# Altium PCB eBoard_ATMEGA328_V1-0.PcbDoc
Units mm, origin at the board's own origin, x right, y up, seen from the top; angles counter-clockwise.
Board outline 53.59 x 68.71 mm, 2 copper layers (Top Layer, Bottom Layer), stack 1.571 mm thick; 57 components, 52 nets, 216 pads, 187 vias.
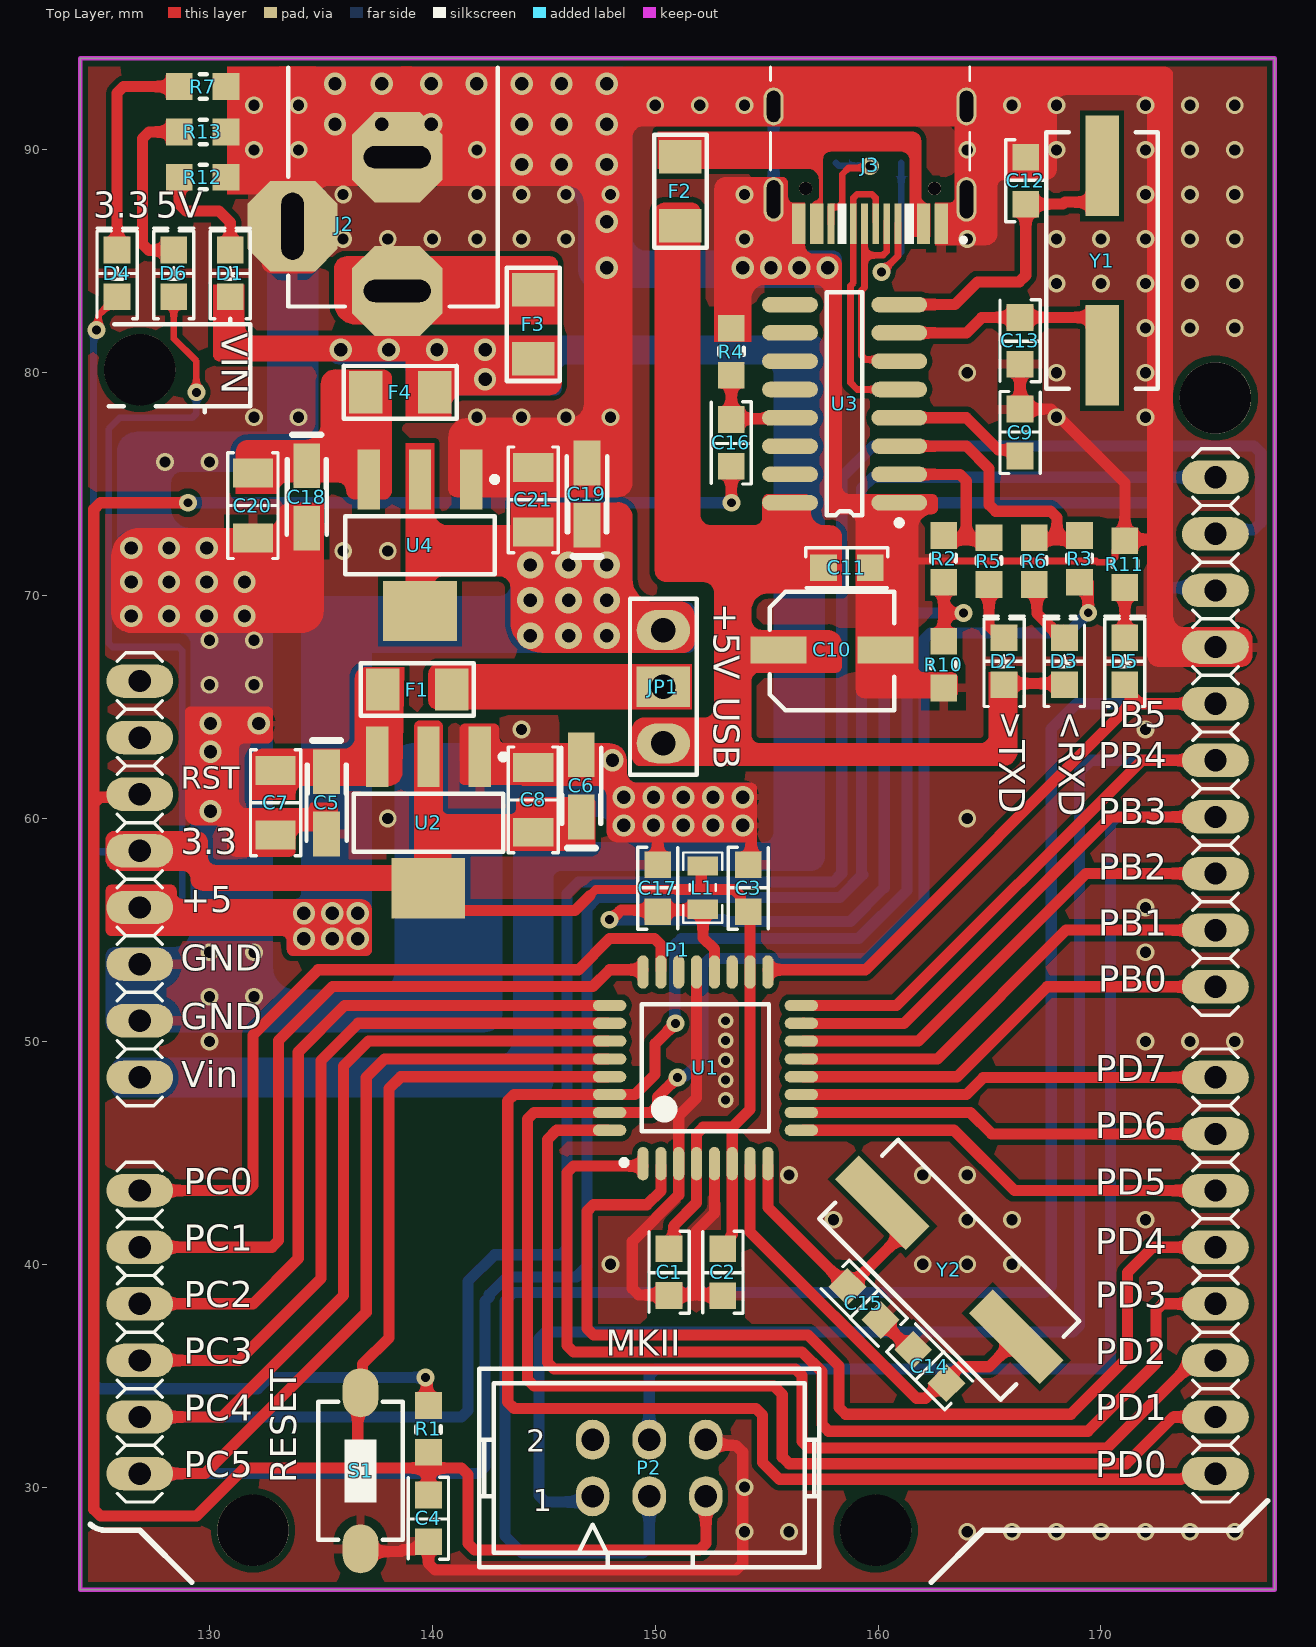
[diagram p0: Top Layer view]
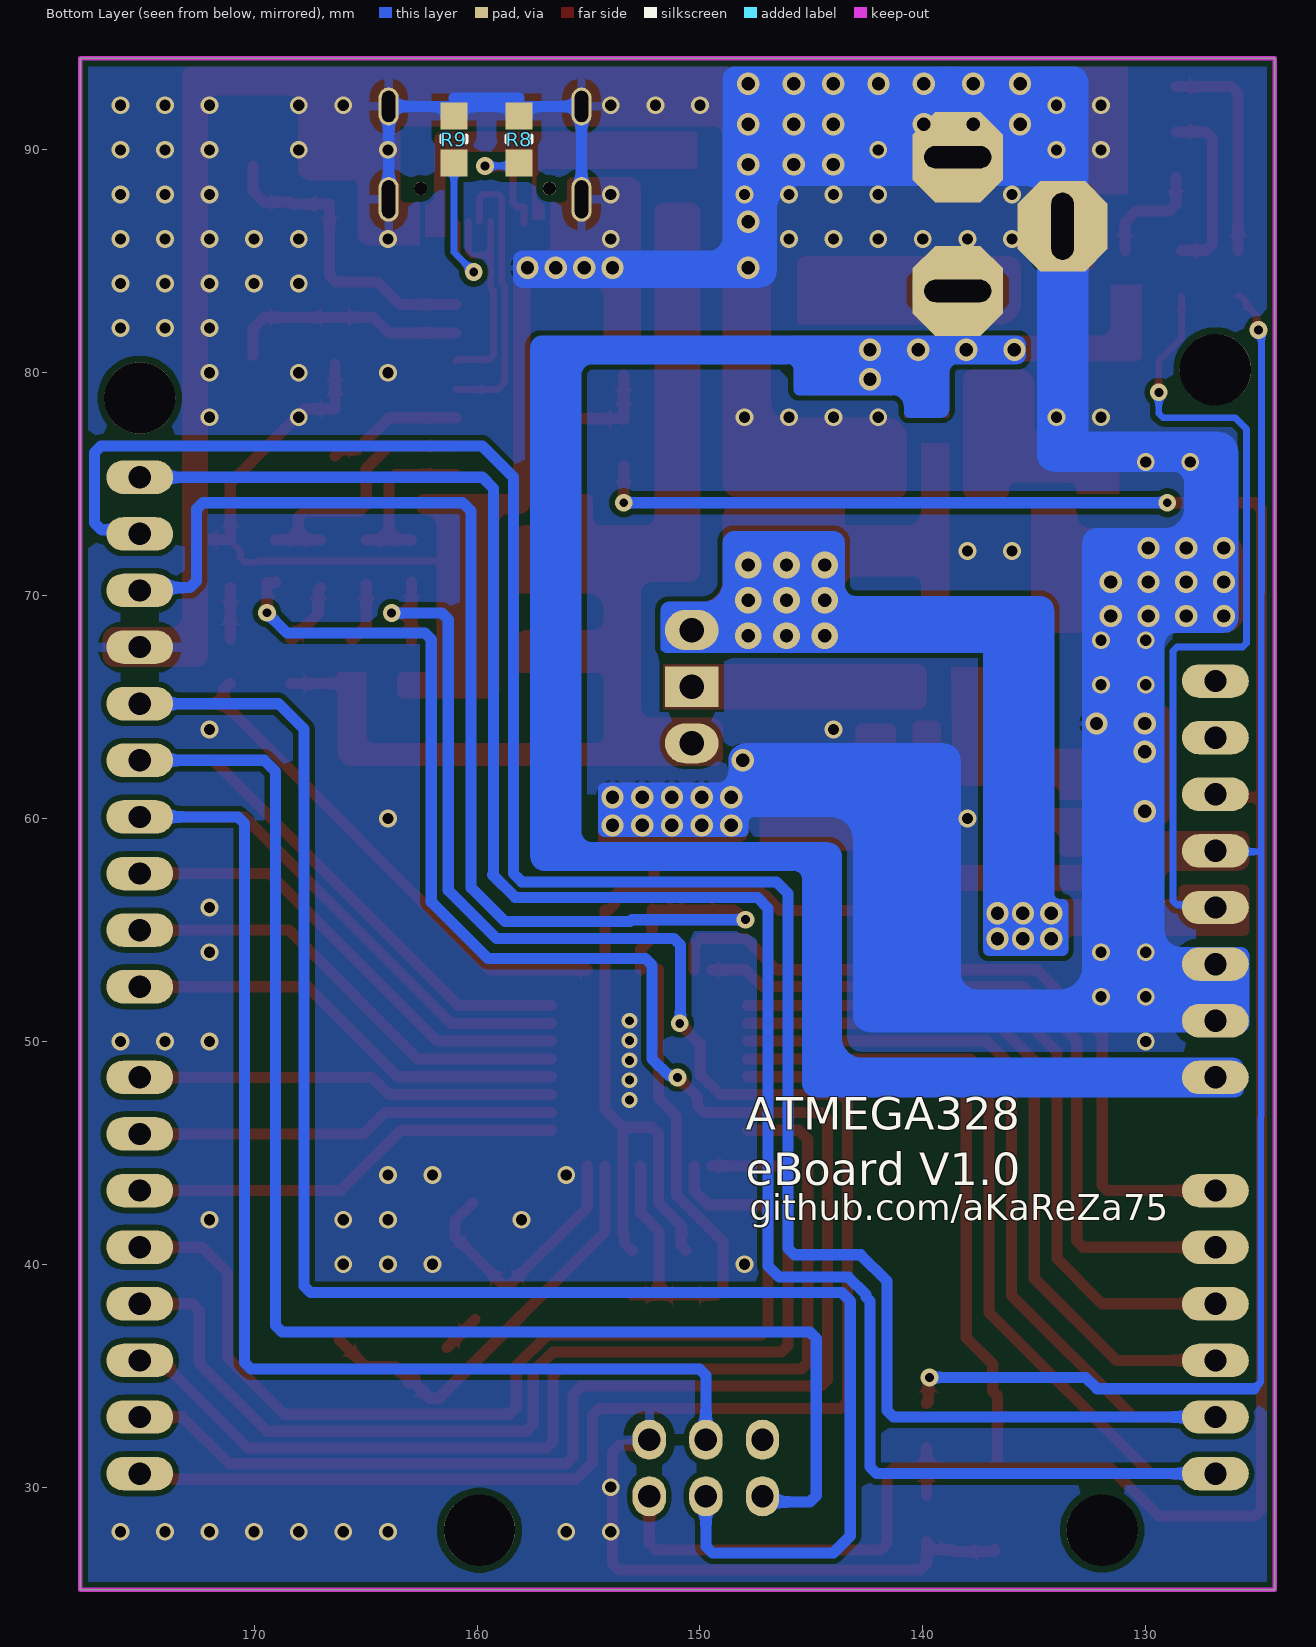
[diagram p1: Bottom Layer view, seen from below]

## Layer stack, top to bottom
Top Solder: solder mask 0.0102, Solder Resist, Dk 3.5
Top Layer: signal copper 0.0356
Dielectric 1: dielectric 1.5, FR-4, Dk 4.8
Bottom Layer: signal copper 0.0356
Bottom Solder: solder mask 0.0102, Solder Resist, Dk 3.5

## Board outline
124.206,25.4 124.206,94.107 177.8,94.107 177.8,25.4

## Design rules (kind name [scope] priority, off if disabled: settings)
AcuteAngle [All] p1: minimum=6.00000000000000E+0001 checktracksonly=TRUE
AssemblyTestPointUsage [All] p1 off:
AssemblyTestpoint [All] p1 off: testpointundercomponent=TRUE minsize=1.016 maxsize=2.54 preferedsize=1.524 minholesize=0 maxholesize=1.016 preferedholesize=0.813 testpointgrid=0.025 usegrid=TRUE gridtolerance=0 allowsidetop=TRUE allowsidebottom=TRUE
BoardOutlineClearance [All] p1: gap=0.2 ignorepadtopadclearanceinfootprint=FALSE
Clearance Poly_Clearance [All vs InPolygon] p1: gap=0.25 ignorepadtopadclearanceinfootprint=TRUE except(0.3: Arc-Hole Track-Hole SMDPad-Hole THPad-Hole Via-Hole Fill-Hole Poly-Hole Region-Hole Text-Hole)
Clearance [All] p2: gap=0.2 ignorepadtopadclearanceinfootprint=FALSE except(0.3: Arc-Hole Track-Hole SMDPad-Hole THPad-Hole Via-Hole Fill-Hole Poly-Hole Region-Hole Text-Hole)
FabricationTestPointUsage [All] p1 off: valid=0 allowmultiple=FALSE
FabricationTestpoint [All] p1 off: side=3 testpointundercomponent=TRUE minsize=1.016 maxsize=2.54 preferedsize=1.524 minholesize=0 maxholesize=1.016 preferedholesize=0.813 testpointgrid=0.025 allowsidetop=TRUE allowsidebottom=TRUE usegrid=TRUE gridtolerance=0
HoleSize [All] p1: absolutevalues=TRUE maxlimit=10 minlimit=0.4 maxpercent=80.000 minpercent=20.000
HoleToHoleClearance [All] p1: gap=0.3 allowstackedmicrovias=TRUE
MinimumAnnularRing [All] p1: minimumring=0.15
MinimumSolderMaskSliver [All] p1: minsoldermaskwidth=0.01
PolygonConnect [All] p1: thpad.connectstyle=Relief thpad.reliefconductorwidth=0.4 thpad.reliefentries=4 thpad.polygonreliefangle="90 Angle" thpad.airgapwidth=0.4 smdpad.connectstyle=Relief smdpad.reliefconductorwidth=0.4 smdpad.reliefentries=4 smdpad.polygonreliefangle="90 Angle" smdpad.airgapwidth=0.4 via.connectstyle=Direct via.reliefconductorwidth=0.254 via.reliefentries=4 via.polygonreliefangle="90 Angle" via.airgapwidth=0.254
RoutingVias [All] p1: holewidth=0.4 width=0.7 viastyle="Through Hole" minholewidth=0.4 minwidth=0.7 maxholewidth=3 maxwidth=6
SilkToSilkClearance [All] p1: silktosilkclearance=0
SilkToSolderMaskClearance [IsPad] p1: minsilkscreentomaskgap=0.01 clearancetoexposedcopper=TRUE
SolderMaskExpansion [All] p1: expansion=0.102 istentingtop=FALSE
Width [All] p1: maxlimit=10 minlimit=0.2 preferedwidth=0.3
21 further rules are at their usual default settings.

## Classes and differential pairs
component class U_USBtoTTL: C9 C10 C11 C12 C13 C16 D2 D3 F2 J3 R2 R3 R4 R5 R6 R8 R9 R10 U3 Y1
component class U_MicroController: C1 C2 C3 C4 C14 C15 C17 D5 L1 P1 P2 R1 R11 S1 U1 Y2
component class U_Supply: C5 C6 C7 C8 C18 C19 C20 C21 D1 D4 D6 F1 F3 F4 J2 JP1 R7 R12 R13 U2 U4

## Components (designator, comment, footprint, x,y, rotation, side; value= is the part's Value field where it differs from the comment)
C1 "100n" "CAP 0805/2012" 150.622,39.624 r270 top
C2 "100n" "CAP 0805/2012" 153.035,39.616 r270 top
C3 "100n" "CAP 0805/2012" 154.178,56.896 r90 top
C4 "100n" "CAP 0805/2012" 139.827,28.575 r270 top
C5 "10u" SMT_C_Tantalum_A 135.255,60.706 r270 top
C6 "22u" SMT_C_Tantalum_A 146.685,61.468 r90 top
C7 "100n" "CAP 1206/3216" 132.969,60.706 r270 top
C8 "100n" "CAP 1206/3216" 144.526,60.833 r90 top
C9 "10p" "CAP 0805/2012" 166.37,77.343 r90 top
C10 "10u" "CAP ALUM 5MM" 157.734,67.564 r0 top
C11 "100n" "CAP 0805/2012" 158.623,71.247 r0 top
C12 "22p" "CAP 0805/2012" 166.624,88.637 r90 top
C13 "22p" "CAP 0805/2012" 166.37,81.407 r270 top
C14 "22p" "CAP 0805/2012" 162.306,35.433 r135 top
C15 "22p" "CAP 0805/2012" 159.385,38.227 r315 top
C16 "100n" "CAP 0805/2012" 153.416,76.827 r270 top
C17 "100n" "CAP 0805/2012" 150.114,56.896 r90 top
C18 "10u" SMT_C_Tantalum_A 134.366,74.422 r270 top
C19 "22u" SMT_C_Tantalum_A 146.939,74.549 r90 top
C20 "100n" "CAP 1206/3216" 131.953,74.041 r270 top
C21 "100n" "CAP 1206/3216" 144.526,74.295 r90 top
D1 "Yellow" "LED 0805/2012 YELLOW" 130.937,84.455 r90 top
D2 "RED" "LED 0805/2012 RED" 165.65,67.056 r90 top value=Red
D3 "RED" "LED 0805/2012 RED" 168.36,67.056 r90 top value=Red
D4 "Green" "LED 0805/2012 GREEN" 125.857,84.455 r90 top
D5 "Green" "LED 0805/2012 GREEN" 171.069,67.056 r90 top
D6 "Red" "LED 0805/2012 RED" 128.397,84.455 r90 top
F1 "0.5A" 1206_F 139.319,65.786 r180 top
F2 "500m" 1206_F 151.13,88.138 r270 top
F3 "3A" 1206_F 144.526,82.169 r270 top
F4 "0.5A" 1206_F 138.557,79.121 r180 top
J2 "Female" "Power Jack BIG" 138.43,98.171 r270 top
J3 "12b" "HRO_TYPE-C-31-M-12 - Extended" 159.639,91.948 r180 top
JP1 "0b" "jumper selector" 150.368,68.453 r270 top
L1 "100u" IND0805 152.135,56.898 r270 top
P1 "UNO" ARDUINO_UNO_CONNECTOR 126.873,80.137 r270 top locked
P2 "3x2" IDC_2X3 149.733,30.861 r0 top
R1 "10K" "RES 0805 (2012X06L)" 139.827,31.766 r90 top
R2 "1K" "RES 0805 (2012X06L)" 162.941,72.501 r270 top
R3 "1K" "RES 0805 (2012X06L)" 169.037,72.501 r270 top
R4 "10K" "RES 0805 (2012X06L)" 153.416,81.791 r270 top
R5 "680" "RES 0805 (2012X06L)" 164.973,72.399 r270 top
R6 "680" "RES 0805 (2012X06L)" 167.005,72.399 r270 top
R7 "220b" "RES 0805 (2012X06L)" 130.548,92.837 r180 top
R8 "4.7K" "RES 0805 (2012X06L)" 158.115,91.313 r270 bottom
R9 "4.7K" "RES 0805 (2012X06L)" 161.036,91.313 r270 bottom
R10 "1.8K" "RES 0805 (2012X06L)" 162.941,66.056 r90 top
R11 "1k" "RES 0805 (2012X06L)" 171.069,72.263 r270 top value=1K
R12 "1.8k" "RES 0805 (2012X06L)" 130.548,88.773 r180 top value=1.8K
R13 "680b" "RES 0805 (2012X06L)" 130.548,90.805 r180 top
S1 "PB" SW_PB_SMD_2PIN_SPST_6X3X2 136.779,30.734 r90 top
U1 "ATmega328P" ATMEGA328 152.254,48.813 r90 top
U2 "3.3V" SOT223_M 139.827,59.817 r270 top
U3 "CH340G" SO16_M 158.496,78.613 r180 top
U4 "3.3V" SOT223_M 139.446,72.263 r270 top
Y1 "12M" "Crystal SMD" 170.053,85.031 r270 top
Y2 "12M" "Crystal SMD" 163.195,39.751 r135 top

## Footprints (in the part's own frame and the unit in brackets; to place one, negate y for a bottom-side part, rotate by r counter-clockwise, add the part's x,y. Pads: shape width x height; smd on the part's side, far side on the other; paste and mask are expansions set on the pad)
1206_F [mm] "Surface mount FUSE 1206"
  rect 1.5x1.9 smd: 1(-1.55,0) 2(1.55,0)
  silkscreen extent -2.54,-1.18 2.54,1.18, body extent -2.64,-1.28 2.64,1.29, height 0.71
ARDUINO_UNO_CONNECTOR [mm] "Arduino Uno Connector"
  oval 1.5x3 hole 1: AD1(36.83,0) AD2(39.37,0) AD3(41.91,0) AD4(44.45,0) AD5(46.99,0) AD6(49.53,0) IOH1(27.686,48.26) IOH2(25.146,48.26) IOH3(22.606,48.26) IOH4(20.066,48.26) IOH5(17.526,48.26) IOH6(14.986,48.26) IOH7(12.446,48.26) IOH8(9.906,48.26) IOH9(7.366,48.26) IOH10(4.826,48.26) IOL1(49.53,48.26) IOL2(46.99,48.26) IOL3(44.45,48.26) IOL4(41.91,48.26) IOL5(39.37,48.26) IOL6(36.83,48.26) IOL7(34.29,48.26) IOL8(31.75,48.26) POW1(13.97,0) POW2(16.51,0) POW3(19.05,0) POW4(21.59,0) POW5(24.13,0) POW6(26.67,0) POW7(29.21,0) POW8(31.75,0)
  round 3.2 hole 3.2: H1(0,0) H2(52.07,5.08) H3(52.07,33.02) H4(1.27,48.26)
  silkscreen extent 3.56,-2.21 54.41,50.6, body extent -1.7,-2.34 54.54,50.73, height 1.27
ATMEGA328 [mm] "Thin QFP, 32-Leads, Body 7x7mm, Pitch 0.8mm, IPC Low Density"
  oval 1.5x0.5 smd: 1(-4.301,2.8) 2(-4.301,2) 3(-4.301,1.2) 4(-4.301,0.4) 5(-4.301,-0.4) 6(-4.301,-1.2) 7(-4.301,-2) 8(-4.301,-2.8) 17(4.301,-2.8) 18(4.301,-2) 19(4.301,-1.2) 20(4.301,-0.4) 21(4.301,0.4) 22(4.301,1.2) 23(4.301,2) 24(4.301,2.8)
  oval 0.5x1.5 smd: 9(-2.8,-4.301) 10(-2,-4.301) 11(-1.2,-4.301) 12(-0.4,-4.301) 13(0.4,-4.301) 14(1.2,-4.301) 15(2,-4.301) 16(2.8,-4.301) 25(2.8,4.301) 26(2,4.301) 27(1.2,4.301) 28(0.4,4.301) 29(-0.4,4.301) 30(-1.2,4.301) 31(-2,4.301) 32(-2.8,4.301)
  silkscreen extent -4.37,-2.85 2.85,3.77, body extent -5.75,-5.75 5.75,5.75, height 1.2
"CAP 0805/2012" [mm] "Chip Capacitor, 2-Leads, Body 2.00x1.20mm, IPC Medium Density"
  rect 1.2x1.2 smd: 1(-1.075,0) 2(1.025,0)
  silkscreen extent -1.86,-0.9 1.82,0.9, body extent -1.94,-0.97 1.89,0.98, height 1.15
"CAP 1206/3216" [mm] "Chip Capacitor, 2-Leads, Body 3.25x1.60mm, IPC Medium Density"
  rect 1.3x1.8 smd: 1(-1.45,0) 2(1.45,0)
  silkscreen extent -2.37,-1.12 2.37,1.12, body extent -2.45,-1.2 2.45,1.2, height 1.6
"CAP ALUM 5MM" [mm] "Aluminum Electrolytic Capacitor, Body 6.60x6.60x7.70mm, IPC Low Density"
  rect 2.5x1.2 smd: 1(-2.2,0) 2(2.6,0)
  silkscreen extent -2.6,-2.7 3,2.6, body extent -5.32,-3.92 5.33,3.93, height 7.7
"Crystal SMD" [mm] "DESIGNER ABBAS BASEREH"
  rect 4.5x1.5 smd: 1(-4.25,0) 2(4.25,0)
  silkscreen extent -5.75,-2.5 5.75,2.5, body extent -6.9,-2.8 6.9,2.8, height 4
"HRO_TYPE-C-31-M-12 - Extended" [mm]
  rect 0.6x1.8 smd mask+0.05: A1_B12(-3.2,5.264) A4_B9(-2.4,5.264) B1_A12(3.2,5.264) B4_A9(2.4,5.264)
  rect 0.3x1.8 smd mask+0.05: A5(-1.25,5.264) A6(-0.25,5.264) A7(0.25,5.264) B5(1.75,5.264) B6(0.75,5.264) B7(-0.75,5.264)
  oval 0.9x2 hole 0.6 slot 1.7 at 90 deg: S1(-4.325,4.17) S2(4.325,4.17)
  oval 0.9x1.7 hole 0.6 slot 1.4 at 90 deg: S3(-4.325,0) S4(4.325,0)
  round 0.6 hole 0.6 unplated: ""(-2.89,3.68) ""(2.89,3.68)
  silkscreen extent -4.47,-1.77 4.47,6.17, body extent -5.56,-2.87 9.06,6.21, height 3.26
IDC_2X3 [mm] "IDC2X3 FOR PROGPIN AND JUMPER BOX AND ETC. DESIGNER ABBAS BASEREH"
  oval 1.5x1.8 hole 1 mask+0.1: 1(-2.54,-1.27) 2(-2.54,1.27) 3(0,-1.27) 4(0,1.27) 5(2.54,-1.27) 6(2.54,1.27)
  silkscreen extent -7.62,-4.44 7.62,4.44, body extent -7.88,-4.67 7.88,4.68, height 7.62
IND0805 [mm] "Chip Inductor, 2-Leads, Body 2/00x1/25mm, IPC Medium Density DESIGNER:ABBAS BASEREH"
  rect 0.87x1.37 smd: 1(-0.97,0) 2(0.97,0)
  silkscreen extent -1.58,-0.87 1.58,0.87, body extent -1.68,-0.97 1.68,0.98, height 0.5
"jumper selector" [mm]
  oval 1.8x2.4 hole 1.1: 1(0,0) 3(5.08,0)
  rect 1.8x2.4 hole 1.1: 2(2.54,0)
  silkscreen extent -1.4,-1.5 6.48,1.5, body extent -1.5,-1.6 6.58,1.6, height 1.27
"LED 0805/2012 GREEN" [mm] "Chip Diode, 2-Leads, Body 2.00x1.25mm, IPC Medium Density"
  rect 1.2x1.2 smd: 1(-1.05,0) 2(1.05,0)
  silkscreen extent -2.03,-0.9 2.03,0.9, body extent -2.11,-0.97 2.11,0.98, height 0.7
"LED 0805/2012 RED" [mm] "Chip Diode, 2-Leads, Body 2.00x1.25mm, IPC Medium Density"
  rect 1.2x1.2 smd: 1(-1.05,0) 2(1.05,0)
  silkscreen extent -2.03,-0.9 2.03,0.9, body extent -2.11,-0.97 2.11,0.98, height 0.7
"LED 0805/2012 YELLOW" [mm] "Chip Diode, 2-Leads, Body 2.00x1.25mm, IPC Medium Density"
  rect 1.2x1.2 smd: 1(-1.05,0) 2(1.05,0)
  silkscreen extent -2.03,-0.9 2.03,0.9, body extent -2.11,-0.97 2.11,0.98, height 0.7
"Power Jack BIG" [mm] "Power Adaptor Jack"
  oct 4.05x4.05 hole 1 slot 3 at 90 deg: 1(14.5,0) 2(8.5,0)
  oct 4.05x4.05 hole 1 slot 3 at 0 deg: 3(11.6,-4.7)
  Top Layer region: 13.125,-5.7 13.625,-5.2 13.625,-4.2 13.125,-3.7 10.075,-3.7 9.575,-4.2 9.575,-5.2 10.075,-5.7
  Top Layer region: 7.5,-1.525 8,-2.025 9,-2.025 9.5,-1.525 9.5,1.525 9,2.025 8,2.025 7.5,1.525
  Top Layer region: 13.5,-1.525 14,-2.025 15,-2.025 15.5,-1.525 15.5,1.525 15,2.025 14,2.025 13.5,1.525
  Bottom Layer region: 13.125,-5.7 13.625,-5.2 13.625,-4.2 13.125,-3.7 10.075,-3.7 9.575,-4.2 9.575,-5.2 10.075,-5.7
  Bottom Layer region: 7.5,-1.525 8,-2.025 9,-2.025 9.5,-1.525 9.5,1.525 9,2.025 8,2.025 7.5,1.525
  Bottom Layer region: 13.5,-1.525 14,-2.025 15,-2.025 15.5,-1.525 15.5,1.525 15,2.025 14,2.025 13.5,1.525
  silkscreen extent 4.49,-4.9 15.2,4.5, body extent 4.39,-5.8 15.6,4.6, height 1.27
"RES 0805 (2012X06L)" [mm] "Chip Resistor, 2-Leads, Body 2.0x1.3mm, IPC High Density _ (0.100 W)"
  rect 1.2x1.2 smd: 1(-0.2,0) 2(1.9,0)
  silkscreen extent 0.67,-0.55 0.98,0.55, body extent -0.9,-0.8 2.6,0.8, height 0.65
SMT_C_Tantalum_A [mm] "Capacitor, SM Tantalum; Body 3.2 x 1.6 mm (LxW typ)"
  rect 2x1.2 smd: 1(-1.4,0) 2(1.4,0)
  silkscreen extent -2.79,-0.9 1.7,0.9, body extent -2.95,-1.07 2.59,1.07, height 1.8
SO16_M [mm] "16-Pin Small Outline Integrated Circuit 1.27 mm Pitch, IPC Low Density - DESIGNER ABBAS BASEREH"
  oval 2.5x0.7 smd: 1(-2.45,4.445) 2(-2.45,3.175) 3(-2.45,1.905) 4(-2.45,0.635) 5(-2.45,-0.635) 6(-2.45,-1.905) 7(-2.45,-3.175) 8(-2.45,-4.445) 9(2.45,-4.445) 10(2.45,-3.175) 11(2.45,-1.905) 12(2.45,-0.635) 13(2.45,0.635) 14(2.45,1.905) 15(2.45,3.175) 16(2.45,4.445)
  silkscreen extent -2.58,-5 0.8,5.47, body extent -4.25,-5.55 4.25,5.6, height 1.75
SOT223_M [mm] "SOT223, 4-Leads, Body 6.5x3.5mm, Pitch 2.3mm, Lead Span 7mm, IPC Low Density"
  rect 2.7x1 smd: 1(-2.95,2.3) 2(-2.95,0) 3(-2.95,-2.3)
  rect 2.7x3.3 smd: 4(2.95,0)
  silkscreen extent -3.07,-3.35 1.3,3.48, body extent -4.85,-3.9 4.85,3.9, height 1.7
SW_PB_SMD_2PIN_SPST_6X3X2 [mm] "SWITCH, PUSHBUTTON, SMD, SPST, 6X3.5X2.5mm, RS-282G05A3, SKQYPA, 50000 Cycles"
  oval 2.2x1.6 smd mask+0.1: 1(-3.5,0) 2(3.5,0)
  silkscreen extent -3.1,-1.9 3.1,1.9, body extent -4.7,-2 4.7,2, height 5

## Part data
C1 C2 C3 C4 C11 C16 C17: library part Cap_Multi_SMD_100nF_0805, "Bipolar ceramic capacitor SMD", Package=0805, Rating=50V, Inflow=inflow?, Type=MultiLayer, Validation=Valid
C5 C18: library part Cap_Tantalum, "Tantalum Capacitor,TAJ Series-SMD", Package=Package?, Rating=16V, Inflow=inflow?, Type=Tantalum, Validation=Valid
C6 C19: library part Cap_Tantalum, "Tantalum Capacitor,TAJ Series-SMD", Package=Package?, Rating=6.3V, Inflow=inflow?, Type=Tantalum, Validation=Valid
C7 C8 C20 C21: library part Cap_Multi_SMD_100nF_1206, "Bipolar ceramic capacitor SMD", Package=1206, Rating=50V, Inflow=inflow?, Type=MultiLayer, Validation=Valid
C9 C12 C13 C14 C15: library part Cap_Multi_SMD_0805, "Bipolar ceramic capacitor SMD", Package=0805, Rating=Rating?, Inflow=inflow?, Type=MultiLayer, Validation=Valid
C10: library part Cap_Electrolit_SMD, "Electrolit Capacitor SMD", Package=SMD, Rating=6.3V, Inflow=inflow?, Type=Electrolit, Validation=Valid
D1 D2 D3 D4 D5 D6: library part Semi_LED_SMD, "LED", Package=Package?, Rating=Rating?, Inflow=inflow?, Type=LED, Validation=Valid
F1 F2 F3 F4: library part Other_Elec_Fuse_SMD, "Short circiut  protection", Package=1206, Rating=Rating?, Inflow=inflow?, Type=Fast, Validation=Valid
J2: library part Con_Power_Jack, "Power Jack", Package=Package?, Rating=Rating?, Inflow=6127, Type=Type?, Validation=Valid
J3: library part Con_USB_C, "USB C Female Connector", Package=SMD, Rating=Rating?, Inflow=inflow?, Type=C, Validation=Valid
JP1: library part SW_Other_JSelector_Dip, "Jumper Selector", Package=Dip, Rating=Rating?, Inflow=5145, Type=Selector, Validation=NT
L1: library part Ind_SMD_0805, "Inductor", Package=0805, Rating=Rating?, Inflow=inflow?, Type=SMD, Validation=Valid
P1: library part Con_Arduino_UNO_Con, "Arduino UNO Connector", Package=Package?, Rating=Rating?, Inflow=inflow?, Type=Type?, Validation=NT
P2: library part Con_Prog_MKII_ISP, "6 Pin Standard ISP Header For MKII", Package=Package?, Rating=Rating?, Inflow=inflow?, Type=Type?, Validation=NT
R1 R2 R3 R4 R5 R6 R7 R8 R9 R10 R11 R12 R13: library part Res_SMD_0805, "Resistor", Package=0805, Rating=0.125W, Inflow=inflow?, Type=10%, Validation=Valid
S1: library part SW_PushButton_2_SMD, "SMT Tactile ‎Switch", Package=SMD, Rating=2b, Inflow=8260, Type=Vertical, Validation=Valid
U1: library part IC_MCU_ATmega328P_SMD, "8-Bit AVR Microcontroller with 32K Bytes of In-System Programmable Flash Memory", Package=Package?, Rating=Rating?, Inflow=inflow?, Type=Type?, Validation=Valid
U2 U4: library part IC_Reg_AMS1117_3.3, "1'A Positive voltage regulator", Package=SOT223, Rating=1A, Inflow=5217, Type=LDO, Validation=Valid
U3: library part IC_Converter_CH340G, "TTL To USB Chip", Package=SO-16, Rating=Rating?, Inflow=inflow?, Type="USB to TTL", Validation=Valid
Y1 Y2: library part Other_Elec_Xtal_SMD, "Crystal Oscillator", Package=SMD, Rating=Rating?, Inflow=inflow?, Type=Quartz, Validation=Valid

## Via types
v1: diameter 0.8, hole 0.5, Top Layer to Bottom Layer, tented both sides, 102 vias
v2: diameter 1, hole 0.6, Top Layer to Bottom Layer, tented both sides, 59 vias
v3: diameter 0.8, hole 0.4, Top Layer to Bottom Layer, tented both sides, 12 vias
v4: diameter 1.2, hole 0.6, Top Layer to Bottom Layer, tented both sides, 9 vias
v5: diameter 0.7, hole 0.4, Top Layer to Bottom Layer, tented both sides, 5 vias

## Nets (pads, with @x,y where several pads share a name; then routed paths per layer and width w, separated by ;. In a path a pad name is that pad's centre, name@x,y a point inside that pad or via, vN(x,y) a via of type N, cw(c..) or ccw(c..) an arc to the next point about the centre after c; other vN are vias at no path point)
+3.3: C1.1 C2.1 C3.1 C6.1 C8.1 D4.1 L1.1 P1.POW4 R1.2 U1.4 U1.6 U1.18 U2.2 U2.4 | length 123.9
  Top Layer w0.3: v3(124.933,81.915) 125.029,82.011 125.029,82.577 125.507,83.055 125.507,83.205 125.757,83.455 D4.1@125.857,83.455
  Top Layer w0.4: 147.07,56.547 147.344,56.821 150.88,56.821 150.887,56.813 150.958,56.813
  Top Layer w0.5: P1.POW4 129.032,58.547 ; v3(139.7,34.925) 139.757,34.868 139.757,33.836 R1.2@139.827,33.766 ; U2.4@139.827,56.817 139.827,59.309 ; U2.4 141.227,55.88 146.403,55.88 147.07,56.547 ; U2.2@139.827,63.017 139.827,59.309 ; C8.1 144.476,59.433 139.951,59.433 139.827,59.309 ; C8.1@144.57,59.383 144.62,59.433 146.392,59.433 146.685,59.726 C6.1@146.685,60.468 ; C1.1@150.622,40.624 150.838,40.84 150.838,41.745 151.854,42.761 151.854,45.853 152.147,46.146 153.454,46.146 ; 150.958,56.813 153.535,56.813 153.828,56.521 153.828,56.171 154.103,55.896 154.254,55.896 U1.18 154.254,46.946 153.454,46.146 ; 151.937,56.819 152.062,56.945 152.062,57.796 L1.1 ; C2.1@153.039,40.616 153.385,40.962 153.385,41.265 153.454,41.334 U1.6 153.454,46.146
  Bottom Layer w0.3: 124.841,34.71 124.821,58.508 124.801,81.685 124.801,81.808 124.896,81.903 v3@124.911,81.916 ; 124.851,58.508 P1.POW4@126.834,58.508 ; 124.862,34.689 125.134,34.417
  Bottom Layer w0.5: 125.134,34.417 132.186,34.417 132.694,34.925 v3(139.7,34.925) ; P1.POW4@126.834,58.508 P1.POW4
+5: C19.1 C21.1 D6.1 JP1.1 P1.POW5 U4.2 U4.4 | length 60.3
  Top Layer w0.3: D6.1@128.397,83.455 128.397,81.534 129.413,80.518 v3(129.413,79.121)
  Top Layer w0.5: U4.4@139.446,69.263 139.446,72.644 ; U4.2@139.446,75.463 139.446,72.644 ; C19.1 146.939,72.683 146.646,72.39 144.777,72.39 C21.1@144.526,72.641 ; JP1.1 147.828,68.453 146.113,68.453 145.034,68.453 144.526,68.961 144.526,69.787 144.526,71.374 C21.1@144.526,72.641 ; 139.446,72.644 139.449,72.641 C21.1@144.526,72.641
  Bottom Layer w0.3: P1.POW5 126.991,56.125 128.602,56.125 128.778,56.301 128.778,67.515 128.602,67.691 125.652,67.691 125.476,67.867 125.476,77.47 125.972,77.966 129.238,77.991 129.413,78.166 v3(129.413,79.121)
  other v2: 134.239,54.61 135.509,54.61 136.652,54.61 134.239,55.753 135.509,55.753 136.652,55.753
  other v4: 144.399,68.199 146.113,68.199 147.828,68.199 144.399,69.787 146.113,69.787 147.828,69.787 144.399,71.374 146.113,71.374 147.828,71.374
ADC6: U1.19
ADC7: U1.22
ARef: C17.1 L1.2 P1.IOH8 U1.20 | length 55.7
  Top Layer w0.5: v3(147.955,55.46) 148.036,55.46 148.464,55.888 150.106,55.888 150.114,55.896 152.103,55.896 L1.2 152.146,55.918 152.146,54.646 152.654,54.138 U1.20@152.654,53.213
  Bottom Layer w0.5: v3(147.955,55.46) 153.051,55.46 153.139,55.372 158.75,55.372 160.274,56.896 160.274,73.787 160.655,74.168 172.3,74.168 172.593,73.875 172.593,70.651 172.886,70.358 175.006,70.358 P1.IOH8
GND: C1.2 C2.2 C3.2 C4.2 C5.2 C6.2 C7.2 C8.2 C9.2 C10.2 C11.2 C12.2 C13.2 C14.2 C15.2 C17.2 C18.2 C19.2 C20.2 C21.2 J2.2 J2.3 J3.A1_B12 J3.B1_A12 J3.S1 J3.S2 J3.S3 J3.S4 P1.IOH7 P1.POW6 P1.POW7 P2.6 R4.1 R7.1 R8.1 R9.1 R10.1 R11.1 R12.1 R13.1 S1.1 U1.3 U1.5 U1.21 U2.1 U3.1 U4.1 | length 156.1
  Top Layer w0.3: 161.496,71.551 169.782,71.551 169.832,71.501 170.443,71.501 170.619,71.677 170.619,72.013 R11.1 R11.1@171.069,72.501
  Top Layer w0.5: 131.548,88.773 131.548,90.805 ; 131.548,92.837 131.548,90.805 ; C7.2 132.969,59.271 133.877,60.179 133.877,60.214 133.908,60.183 134.905,60.183 134.905,60.138 135.255,59.788 C5.2 ; J2.3 133.73,86.698 133.73,90.679 133.604,90.805 ; S1.1 136.779,27.107 138.603,27.107 138.696,27.2 139.477,27.2 C4.2 139.827,26.582 140.12,26.289 153.631,26.289 153.924,26.582 153.924,28 153.924,30 153.924,31.584 153.631,31.877 152.273,31.877 P2.6 ; J2.2 137.155,89.671 136.531,90.295 136.404,90.295 136.347,90.352 136.347,90.378 136.054,90.671 136.054,90.678 135.128,90.678 135.001,90.805 133.604,90.805 ; U4.1@141.746,75.463 141.853,75.569 144.526,75.569 144.702,75.745 146.735,75.745 C19.2 ; U2.1@142.127,63.017 142.127,62.699 142.176,62.65 144.159,62.65 C8.2 144.618,62.375 146.592,62.375 C6.2@146.685,62.468 ; C17.2@150.114,57.896 150.114,59.016 150.407,59.309 154.012,59.309 154.305,59.016 154.305,58.023 C3.2@154.178,57.896 ; U1.21@151.854,53.213 151.854,47.46 151.054,46.66 151.054,44.413 151.054,43.104 148.971,41.021 148.971,38.917 149.264,38.624 150.622,38.624 150.626,38.62 151.828,38.62 ; U1.5@152.654,44.413 152.654,42.291 151.828,41.465 151.828,38.62 ; C2.2@153.035,38.616 153.031,38.62 151.828,38.62 ; C15.2@160.092,37.52 C14.2@161.345,36.267 ; C10.2 160.023,67.875 160.023,71.374 160.023,74.076 160.115,74.168 U3.1 ; J3.A1_B12@162.839,86.784 162.839,86.41 162.889,86.36 163.664,86.36 163.887,86.583 163.887,87.701 J3.S1 v1@163.964,89.662 ; J3.S3 v1@163.964,89.662 ; C13.2 C9.2 167.758,78.368 168.063,78.063 171.069,75.057 171.069,72.501 171.085,72.517 172.554,72.517 172.847,72.224 172.847,68.111 173.14,67.818 175.006,67.818 P1.IOH7 ; C12.2 v1@163.964,89.662 ; 131.548,90.805 133.604,90.805
  Bottom Layer w0.5: J3.S2 J3.S4 J3.S3 J3.S1 ; 158.115,92.313 161.036,92.313
  other v1: 154,28 156,28 164,28 166,28 168,28 170,28 172,28 174,28 176,28 154,30 148,40 162,40 164,40 166,40 158,42 164,42 166,42 172,42 156,44 162,44 164,44 130,50 172,50 174,50 176,50 130,52 132,52 130,54 132,54 172,54 172,56 138,60 164,60 144,64 172,64 130,66 132,66 130,68 132,68 136,72 138,72 128,76 130,76 132,78 134,78 142,78 144,78 146,78 148,78 168,78 172,78 164,80 168,80 172,80 172,82 174,82 176,82 168,84 170,84 172,84 174,84 176,84 136,86 138,86 140,86 142,86 144,86 146,86 154,86 164,86 168,86 170,86 172,86 174,86 176,86 136,88 142,88 144,88 146,88 148,88 154,88 172,88 174,88 176,88 132,90 134,90 142,90 164,90 168,90 172,90 174,90 176,90 132,92 134,92 150,92 152,92 154,92 166,92 168,92 172,92 174,92 176,92
  other v2: 148.59,59.69 149.923,59.69 151.257,59.69 152.59,59.69 153.924,59.69 130.048,60.325 148.59,60.96 149.923,60.96 151.257,60.96 152.59,60.96 153.924,60.96 148.082,62.611 130.048,62.992 130.048,64.262 132.207,64.262 126.492,69.088 128.185,69.088 129.879,69.088 131.572,69.088 126.492,70.612 128.185,70.612 129.879,70.612 131.572,70.612 126.492,72.136 128.185,72.136 129.879,72.136 147.828,84.709 153.924,84.709 155.194,84.709 156.464,84.709 157.734,84.709 147.828,86.773 144.018,89.344 145.796,89.344 147.828,89.344 135.636,91.154 137.731,91.154 139.954,91.154 144.018,91.154 145.796,91.154 147.828,91.154 135.636,92.964 137.731,92.964 139.954,92.964 141.986,92.964 144.018,92.964 145.796,92.964 147.828,92.964
  other v5: 153.162,47.371 153.162,48.26 153.162,49.149 153.162,50.038 153.162,50.927
NetC5_1: C5.1 C7.1 F1.2 U2.3 | length 8.3
  Top Layer w0.5: C7.1 135.205,62.156 C5.1 135.255,61.979 136.954,61.979 137.527,62.552 137.527,63.017 137.623,63.113 137.623,65.49 F1.2@137.919,65.786
NetC9_1: C9.1 U3.4 | length 6.1
  Top Layer w0.5: U3.4 163.957,77.978 165.388,76.547 166.091,76.547 C9.1
NetC12_1: C12.1 U3.8 Y1.1 | length 14.2
  Top Layer w0.5: U3.8 161.55,83.058 163.449,83.058 164.465,84.074 166.331,84.074 166.624,84.367 C12.1 168.303,87.562 168.394,87.653 169.553,87.653 170.053,88.153 Y1.1
NetC13_1: C13.1 U3.7 Y1.2 | length 10.8
  Top Layer w0.5: U3.7 161.55,81.788 163.957,81.788 164.651,82.482 C13.1 169.553,82.482 170.053,81.982 Y1.2
NetC16_1: C16.1 R4.2 U3.13 | length 4.6
  Top Layer w0.5: R4.2 C16.1 153.454,77.94 156.008,77.94 U3.13
NetC18_1: C18.1 C20.1 F4.2 U4.3 | length 9.6
  Top Layer w0.5: C20.1 132.13,75.491 134.035,75.491 C18.1 134.366,75.452 137.135,75.452 U4.3@137.146,75.463 ; U4.3 U4.3@137.146,75.463 ; F4.2@137.157,79.121 137.152,79.116 137.152,75.469 U4.3@137.146,75.463
NetD1_2: D1.2 R12.2 | length 5.1
  Top Layer w0.5: R12.2 128.648,87.542 128.941,87.249 130.429,87.249 130.937,86.741 D1.2@130.937,85.455
NetD2_2: D2.2 R5.2 | length 2.8
  Top Layer w0.5: R5.2 164.973,70.363 164.973,68.633 165.55,68.056 D2.2@165.65,68.056
NetD3_2: D3.2 R6.2 | length 2.9
  Top Layer w0.5: R6.2@167.005,70.363 167.121,70.247 167.121,69.194 168.26,68.056 D3.2@168.36,68.056
NetD4_2: D4.2 R7.2 | length 10
  Top Layer w0.5: D4.2@125.857,85.455 125.857,92.544 126.15,92.837 R7.2
NetD5_2: D5.2 R11.2 | length 2.3
  Top Layer w0.5: D5.2@171.069,68.056 R11.2
NetD6_2: D6.2 R13.2 | length 8
  Top Layer w0.5: D6.2@128.397,85.455 128.36,85.492 127.293,85.492 127,85.785 127,90.512 127.293,90.805 128.309,90.805 R13.2
NetF1_1: F1.1 JP1.2 | length 9.7
  Top Layer w0.5: F1.1@140.719,65.786 150.241,65.786 JP1.2
NetF2_1: F2.1 J3.A4_B9 J3.B4_A9
NetF3_1: F3.1 J2.1 | length 6.1
  Top Layer w0.5: J2.1 138.486,83.615 144.48,83.615 F3.1@144.526,83.569
NetJ3_A5: J3.A5 R9.2 | length 7.8
  Top Layer w0.3: v3(160.147,84.516) 160.17,84.516 160.889,85.234 J3.A5
  Bottom Layer w0.3: v3(160.147,84.516) 161.036,85.405 R9.2
NetJ3_A6: J3.A6 J3.B6 U3.5 | length 12.8
  Top Layer w0.3: J3.A6@159.889,86.784 159.889,87.835 159.713,88.011 159.065,88.011 158.889,87.835 158.889,84.031 158.758,83.9 158.758,79.555 159.065,79.248 U3.5
NetJ3_A7: J3.A7 J3.B7 U3.6 | length 10.3
  Top Layer w0.3: J3.A7@159.389,86.784 159.389,85.266 ; 160.199,85.266 159.389,85.266 ; 160.2,85.266 160.203,85.267 160.206,85.268 160.21,85.27 160.215,85.273 160.222,85.277 160.231,85.284 160.246,85.298 160.389,85.441 J3.B7@160.389,86.784 ; U3.6 160.869,80.595 159.434,80.595 159.258,80.77 159.258,83.693 159.389,83.824 159.389,85.266
NetJ3_B5: J3.B5 R8.2 | length 5.6
  Top Layer w0.3: J3.B5 157.889,87.434 158.213,87.434 158.389,87.609 158.389,88.903 158.672,89.185 159.543,89.185 v3(159.639,89.281)
  Bottom Layer w0.3: R8.2 158.247,89.281 v3(159.639,89.281)
NetR2_1: R2.1 R5.1 U3.2 | length 7.8
  Top Layer w0.5: U3.2 161.55,75.438 163.664,75.438 163.957,75.145 163.957,72.501 ; R2.1@162.941,72.501 163.957,72.501 ; R5.1@164.973,72.501 163.957,72.501
NetR3_1: R3.1 R6.1 U3.3 | length 12.4
  Top Layer w0.5: U3.3 161.55,76.708 163.957,76.708 164.973,75.692 164.973,74.08 165.266,73.787 167.728,73.787 168.021,73.494 168.021,72.501 ; R6.1@167.005,72.501 168.021,72.501 ; R3.1@169.037,72.501 168.021,72.501
PB0: P1.IOH1 U1.12 | length 20.2
  Top Layer w0.5: U1.12@156.654,48.413 163.544,48.413 167.582,52.451 P1.IOH1
PB1: P1.IOH2 U1.13 | length 20.9
  Top Layer w0.5: U1.13@156.654,49.213 162.662,49.213 168.44,54.991 P1.IOH2
PB2: P1.IOH3 U1.14 | length 21.6
  Top Layer w0.5: U1.14@156.654,50.013 161.804,50.013 169.322,57.531 P1.IOH3
PB3: P1.IOH4 P2.4 U1.15 | length 75.1
  Top Layer w0.5: U1.15@156.654,50.813 156.667,50.8 161.163,50.8 170.434,60.071 P1.IOH4
  Bottom Layer w0.5: P2.4 149.733,35.013 150.026,35.306 170.141,35.306 170.434,35.599 170.434,59.778 170.727,60.071 P1.IOH4
PB4: P1.IOH5 P2.1 U1.16 | length 88.4
  Top Layer w0.5: U1.16@156.654,51.613 160.833,51.613 171.831,62.611 P1.IOH5
  Bottom Layer w0.5: P2.1 146.939,29.337 145.073,29.337 144.78,29.63 144.78,36.664 145.073,36.957 168.744,36.957 169.037,37.25 169.037,62.103 169.545,62.611 P1.IOH5
PB5: D5.1 P1.IOH6 P2.3 U1.17 | length 103.4
  Top Layer w0.5: U1.17@155.054,53.213 159.424,53.213 171.362,65.151 ; D5.1@171.069,66.056 171.112,66.056 171.362,65.806 171.362,65.151 ; P1.IOH6 171.362,65.151
  Bottom Layer w0.5: P2.3 149.733,29.337 149.733,27.344 149.44,27.051 144.018,27.051 143.256,27.813 143.256,38.354 143.637,38.735 167.474,38.735 167.767,39.028 167.767,64.008 168.91,65.151 P1.IOH6
PB6: C14.1 U1.7 Y2.1 | length 19.5
  Top Layer w0.5: U1.7@154.254,44.413 154.254,41.453 161.718,33.989 162.132,33.989 162.759,34.616 162.759,34.853 C14.1@163.113,34.853 ; C14.1 163.113,34.719 C14.1@163.113,34.853 ; Y2.1 166.2,36.623 164.979,35.401 163.661,35.401 C14.1@163.113,34.853
PB7: C15.1 U1.8 Y2.2 | length 12.1
  Top Layer w0.5: U1.8@155.054,44.413 155.054,42.558 158.678,38.934 160.991,41.248 160.991,41.955 Y2.2
PC0: P1.AD1 U1.23 | length 33.2
  Top Layer w0.5: P1.AD1 131.73,43.307 131.953,43.53 131.953,50.292 134.874,53.213 146.558,53.213 147.955,54.61 149.961,54.61 150.254,54.317 U1.23@150.254,53.213
PC1: P1.AD2 U1.24 | length 33
  Top Layer w0.5: P1.AD2 132.803,40.767 133.096,41.06 133.096,50.038 135.513,52.455 147.197,52.455 147.955,53.213 U1.24@149.454,53.213
PC2: P1.AD3 U1.25 | length 32
  Top Layer w0.5: P1.AD3 131.953,38.227 133.985,40.259 133.985,49.53 136.068,51.613 U1.25@147.854,51.613
PC3: P1.AD4 U1.26 | length 33
  Top Layer w0.5: P1.AD4 131.318,35.687 135.001,39.37 135.001,49.149 136.665,50.813 U1.26@147.854,50.813
PC4: P1.AD5 P1.IOH9 U1.27 | length 131
  Top Layer w0.5: P1.AD5 130.556,33.147 136.017,38.608 136.017,48.895 137.135,50.013 U1.27@147.854,50.013
  Bottom Layer w0.5: P1.AD5 141.312,33.147 141.605,33.44 141.605,39.243 142.787,40.425 145.757,40.425 146.05,40.718 146.05,56.642 146.558,57.15 157.993,57.15 158.369,57.526 158.369,75.311 159.766,76.708 176.872,76.708 177.165,76.415 177.165,73.255 176.872,72.962 175.324,72.962 P1.IOH9
PC5: P1.AD6 P1.IOH10 U1.28 | length 125.6
  Top Layer w0.5: P1.AD6 129.794,30.607 137.033,37.846 137.033,48.387 137.859,49.213 U1.28@147.854,49.213
  Bottom Layer w0.5: P1.AD6 142.074,30.607 142.367,30.9 142.367,38.352 142.556,38.541 142.556,38.644 143.347,39.435 146.457,39.435 146.939,39.917 146.939,55.968 147.421,56.45 158.283,56.45 159.31,57.477 ; 159.258,57.529 159.258,74.805 159.764,75.311 P1.IOH10
PD0: P1.IOL1 R2.2 R10.2 U1.30 | length 91.1
  Top Layer w0.5: v3(150.907,50.811) 149.987,49.891 149.987,48.514 149.086,47.613 147.854,47.613 143.676,47.613 143.383,47.32 143.383,33.821 143.676,33.528 154.52,33.528 154.813,33.235 154.813,31.115 155.575,30.353 173.59,30.353 173.653,30.416 174.942,30.416 P1.IOL1 ; R10.2 162.941,69.215 ; R2.2 162.941,69.215 ; v3(163.83,69.215) 162.941,69.215
  Bottom Layer w0.5: v3(150.907,50.811) 150.876,50.842 150.876,54.317 151.169,54.61 159.131,54.61 161.29,56.769 161.29,68.922 161.583,69.215 v3(163.83,69.215)
PD1: P1.IOL2 R3.2 U1.31 | length 92.5
  Top Layer w0.5: v3(151.003,48.387) 150.114,47.498 150.114,47.117 149.81,46.813 147.854,46.813 144.565,46.813 144.272,46.52 144.272,34.837 144.565,34.544 155.321,34.544 155.702,34.163 155.702,31.346 155.995,31.053 171.134,31.053 173.228,33.147 P1.IOL2 ; R3.2 169.042,70.596 169.427,70.596 v3(169.427,69.23)
  Bottom Layer w0.5: v3(151.003,48.387) 151.06,48.444 151.371,48.444 152.146,49.219 152.146,53.428 152.439,53.721 159.512,53.721 162.052,56.261 162.052,68.033 162.345,68.326 168.523,68.326 v3(169.427,69.23)
PD2: P1.IOL3 U1.32 | length 47.8
  Top Layer w0.5: U1.32@147.854,46.013 145.581,46.013 145.161,45.593 145.161,35.599 145.454,35.306 156.298,35.306 156.591,35.013 156.591,32.046 156.884,31.753 170.271,31.753 174.205,35.687 P1.IOL3
PD3: P1.IOL4 U1.1 | length 47.1
  Top Layer w0.5: U1.1@149.454,44.413 146.343,44.413 146.05,44.12 146.05,36.361 146.343,36.068 156.591,36.068 157.48,35.179 157.48,32.805 157.773,32.512 169.418,32.512 172.466,35.56 172.466,37.934 172.759,38.227 P1.IOL4
PD4: P1.IOL5 U1.2 | length 46.3
  Top Layer w0.5: U1.2@150.254,44.413 150.254,43.294 149.632,42.672 147.232,42.672 146.939,42.379 146.939,37.123 147.232,36.83 156.845,36.83 158.242,35.433 158.242,33.567 158.535,33.274 168.656,33.274 171.196,35.814 171.196,39.624 172.339,40.767 P1.IOL5
PD5: P1.IOL6 U1.9 | length 19.6
  Top Layer w0.5: U1.9@156.654,46.013 163.41,46.013 166.116,43.307 P1.IOL6
PD6: P1.IOL7 U1.10 | length 18.9
  Top Layer w0.5: U1.10@156.654,46.813 164.134,46.813 165.1,45.847 P1.IOL7
PD7: P1.IOL8 U1.11 | length 18.8
  Top Layer w0.5: U1.11@156.654,47.613 156.666,47.625 163.957,47.625 164.719,48.387 P1.IOL8
Reset: C4.1 C16.2 P1.POW3 P2.5 R1.1 S1.2 U1.29 | length 141.4
  Top Layer w0.5: P1.POW3 126.746,60.96 125.105,60.96 124.812,60.667 ; v3(129.032,74.168) 125.105,74.168 124.812,73.875 124.812,60.667 ; C4.1 139.827,30.861 ; R1.1@139.827,31.766 139.827,30.861 ; U1.29@147.854,48.413 138.583,48.413 138.049,47.879 138.049,36.703 136.862,35.516 136.862,34.317 S1.2 136.652,34.107 136.652,31.154 136.945,30.861 ; P2.5 152.273,29.337 152.273,27.471 151.98,27.178 141.898,27.178 141.605,27.471 141.605,30.568 141.312,30.861 139.827,30.861 ; v3(153.416,74.168) C16.2 ; 124.812,60.667 124.812,28.995 125.105,28.702 129.413,28.702 131.572,30.861 136.945,30.861 ; 136.945,30.861 139.827,30.861
  Bottom Layer w0.5: v3(129.032,74.168) v3(153.416,74.168)
Vin: D1.1 F3.2 F4.1 P1.POW8
  other v2: 142.367,79.71 135.89,81.026 138.049,81.026 140.208,81.026 142.367,81.026
Vusb: C10.1 C11.1 D2.1 D3.1 F2.2 JP1.3 U3.16 | length 31.8
  Top Layer w0.5: JP1.3 153.631,63.373 153.924,63.666 153.924,66.89 153.797,67.017 153.797,70.7 154.09,70.993 156.842,70.993 C11.1@157.223,71.374 ; F2.2@151.13,86.738 151.003,86.611 151.13,86.484 151.13,73.572 151.423,73.279 ; C10.1@154.598,67.564 C10.1 ; D2.1@165.65,66.056 D3.1@168.36,66.056
pads on no net: J3. P1.H1 P1.H2 P1.H3 P1.H4 P1.POW1 P1.POW2 P2.2 U3.9 U3.10 U3.11 U3.12 U3.14 U3.15

## Polygon pours and split planes (outlines as drawn)
GND on Bottom Layer "GND_L02_P002" (solid, remove dead copper, pour order 2): 177.538,93.717 124.366,93.717 124.366,25.391 177.792,25.391
GND on Top Layer "GND_L01_P000" (solid, remove dead copper, pour order 0): 177.546,93.726 124.374,93.726 124.374,25.4 177.8,25.4

## Keep-outs
Keep-Out Layer:
  the board outline again, w0.2

## Other copper
Top Layer:
  region net NetF2_1: 157.861,89.916 161.036,89.916 cw(c161.036,89.535) 161.417,89.535 161.417,86.106 162.329,86.106 162.329,87.573 cw(c162.329,87.977) 161.925,87.977 161.925,90.424 ccw(c161.544,90.424) 161.544,90.805 150.114,90.805 150.114,89.154 156.845,89.154 cw(c156.845,88.646) 157.353,88.646 157.353,87.884 cw(c157.205,87.884) 157.246,87.742 ccw(c157.353,87.376) 156.972,87.376 156.972,86.862 157.524,86.862 157.524,89.579 cw(c157.861,89.579)
  region net GND: 168.402,92.456 171.577,92.456 cw(c171.577,91.948) 172.085,91.948 172.085,67.31 ccw(c172.593,67.31) 172.593,66.802 176.276,66.802 ccw(c176.276,67.31) 176.784,67.31 176.784,68.072 ccw(c176.276,68.072) 176.276,68.58 173.736,68.58 cw(c173.736,69.088) 173.228,69.088 173.228,93.345 ccw(c172.847,93.345) 172.847,93.726 130.81,93.726 130.81,88.011 132.334,88.011 132.334,84.963 ccw(c132.842,84.963) 132.842,84.455 134.493,84.455 ccw(c134.493,84.836) 134.874,84.836 134.874,87.884 cw(c135.382,87.884) 135.382,88.392 145.415,88.392 146.05,88.392 cw(c146.05,87.63) 146.812,87.63 146.812,78.613 cw(c146.177,78.613) 146.177,77.978 141.605,77.978 ccw(c141.605,77.089) 140.716,77.089 140.716,74.803 ccw(c141.097,74.803) 141.097,74.422 148.336,74.422 ccw(c148.336,75.057) 148.971,75.057 148.971,90.551 cw(c149.479,90.551) 149.479,91.059 163.449,91.059 163.449,87.884 cw(c163.195,87.884) 163.195,87.63 162.56,87.63 162.56,85.725 164.846,85.725 ccw(c164.846,86.233) 165.354,86.233 165.354,88.392 cw(c165.608,88.392) 165.608,88.646 167.513,88.646 ccw(c167.513,89.154) 168.021,89.154 168.021,92.075 cw(c168.402,92.075)
  region net GND: 128.905,60.198 ccw(c129.413,60.198) 129.413,59.69 130.302,59.69 cw(c130.302,59.182) 130.81,59.182 130.81,58.674 ccw(c131.191,58.674) 131.191,58.293 133.604,58.293 ccw(c133.604,58.547) 133.858,58.547 133.858,59.055 cw(c134.239,59.055) 134.239,59.436 135.509,59.436 ccw(c135.509,59.69) 135.763,59.69 135.763,60.452 ccw(c135.501,60.452) 135.501,60.714 134.628,60.714 ccw(c134.628,60.589) 134.502,60.588 cw(c134.366,60.588) 134.366,60.452 131.699,60.452 cw(c131.699,60.833) 131.318,60.833 131.318,63.119 cw(c131.572,63.119) 131.572,63.373 132.588,63.373 ccw(c132.588,63.627) 132.842,63.627 132.842,64.77 ccw(c132.588,64.77) 132.588,65.024 129.159,65.024 ccw(c129.159,64.77) 128.905,64.77
  region net GND: 135.128,74.16 135.128,69.342 cw(c134.112,69.342) 134.112,68.326 126.492,68.326 cw(c126.492,69.215) 125.603,69.215 125.603,71.755 cw(c126.873,71.755) 126.873,73.025 132.461,73.025 ccw(c132.461,73.644) 133.08,73.644 cw(c133.596,73.644) 133.596,74.16
  region net +5: 125.349,54.991 ccw(c125.603,54.991) 125.603,54.737 133.223,54.737 cw(c133.223,54.483) 133.477,54.483 ccw(c133.858,54.483) 133.479,54.445 133.477,54.445 133.477,54.102 ccw(c133.731,54.102) 133.731,53.848 137.033,53.848 ccw(c137.033,54.102) 137.287,54.102 137.287,55.88 ccw(c136.779,55.88) 136.779,56.388 128.778,56.388 cw(c128.778,56.642) 128.524,56.642 128.524,56.769 ccw(c128.27,56.769) 128.27,57.023 125.603,57.023 ccw(c125.603,56.769) 125.349,56.769
  region net +3.3: 129.921,58.293 129.921,58.928 ccw(c129.413,58.928) 129.413,59.436 125.73,59.436 ccw(c125.73,59.055) 125.349,59.055 125.349,58.166 ccw(c125.857,58.166) 125.857,57.658 128.778,57.658 cw(c128.778,57.277) 129.159,57.277 ccw(c129.667,57.277) 129.667,56.769 141.431,56.769 141.431,57.912 130.302,57.912 cw(c130.302,58.293)
  region net GND: 141.224,61.722 ccw(c141.429,61.722) 141.429,61.517 144.067,61.517 144.018,61.468 147.32,61.468 cw(c147.32,60.96) 147.828,60.96 147.828,59.436 ccw(c148.336,59.436) 148.336,58.928 154.559,58.928 154.559,61.341 ccw(c154.305,61.341) 154.305,61.595 149.225,61.595 cw(c149.225,62.103) 148.717,62.103 148.717,62.611 ccw(c147.955,62.611) 147.955,63.373 143.256,63.373 cw(c143.256,63.627) 143.002,63.627 143.002,64.008 ccw(c142.748,64.008) 142.748,64.262 141.478,64.262 ccw(c141.478,64.008) 141.224,64.008
  region net Vin: 138.811,77.978 140.843,77.978 140.843,78.486 cw(c141.351,78.486) 141.351,78.994 145.288,78.994 ccw(c145.288,79.502) 145.796,79.502 145.796,81.661 139.446,81.661 ccw(c139.445,81.162) 139.344,81.651 139.345,81.661 132.08,81.661 cw(c132.08,82.169) 131.572,82.169 131.572,83.955 130.175,83.955 130.175,80.772 ccw(c130.429,80.772) 130.429,80.518 138.811,80.518
  region net NetC18_1: 138.176,79.755 138.176,74.694 cw(c137.795,74.694) 137.795,74.313 136.525,74.313 cw(c136.525,74.694) 136.144,74.694 ccw(c135.763,74.694) 135.763,75.075 133.496,75.075 ccw(c133.496,74.675) 133.096,74.675 133.096,74.567 131.191,74.567 131.191,76.454 cw(c131.717,76.454) 131.717,76.98 134.257,76.98 ccw(c134.257,77.724) 135.001,77.724 135.001,79.504 cw(c135.648,79.504) 135.652,80.152 137.794,80.139 cw(c137.792,79.755)
  region net +3.3: 139.192,57.15 140.843,57.15 140.843,58.293 cw(c141.097,58.293) 141.097,58.547 147.066,58.547 ccw(c147.066,58.801) 147.32,58.801 147.32,60.706 ccw(c147.066,60.706) 147.066,60.96 144.018,60.96 ccw(c144.018,60.706) 143.764,60.706 143.764,60.452 cw(c143.51,60.452) 143.51,60.198 140.716,60.198 cw(c140.716,60.452) 140.462,60.452 140.462,64.135 ccw(c140.208,64.135) 140.208,64.389 139.446,64.389 ccw(c139.446,64.135) 139.192,64.135
  region net NetC5_1: 138.733,66.786 137.017,66.786 ccw(c137.017,66.294) 136.525,66.294 136.525,63.627 cw(c136.017,63.627) 136.017,63.119 132.334,63.119 ccw(c132.334,62.611) 131.826,62.611 131.826,60.833 133.858,60.833 133.858,61.087 cw(c134.239,61.087) 134.239,61.468 138.045,61.468 ccw(c138.045,62.077) 138.654,62.067
  region net +5: 138.811,69.215 140.081,69.215 140.081,70.485 cw(c140.462,70.485) 140.462,70.866 143.002,70.866 cw(c143.002,70.358) 143.51,70.358 143.51,68.834 ccw(c144.907,68.834) 144.907,67.437 151.257,67.437 ccw(c151.257,67.945) 151.765,67.945 151.765,69.088 ccw(c151.13,69.088) 151.13,69.723 149.987,69.723 cw(c149.987,70.739) 148.971,70.739 148.971,73.54 ccw(c148.319,73.54) 148.301,74.191 147.447,74.168 143.51,74.168 143.51,73.189 143.383,73.152 140.716,73.152 cw(c140.716,73.787) 140.081,73.787 140.081,76.835 138.811,76.835 138.811,70.866
  region net NetF1_1: 139.827,66.494 139.827,65.278 ccw(c140.208,65.278) 140.208,64.897 151.638,64.897 151.638,66.929 140.262,66.929 ccw(c140.262,66.494)
  region net Vusb: 149.352,62.357 153.67,62.357 165.608,62.357 ccw(c165.608,62.992) 166.243,62.992 166.243,66.556 164.973,66.556 164.973,63.754 cw(c164.592,63.754) 164.592,63.373 154.686,63.373 cw(c154.686,63.754) 154.305,63.754 154.305,66.167 cw(c154.686,66.167) 154.686,66.548 158.115,66.548 ccw(c158.115,66.802) 158.369,66.802 158.369,67.818 ccw(c157.734,67.818) 157.734,68.453 154.813,68.453 cw(c154.813,68.961) 154.305,68.961 154.305,69.342 cw(c155.067,69.342) 155.067,70.104 158.369,70.104 158.369,72.644 ccw(c157.861,72.644) 157.861,73.152 157.607,73.152 cw(c157.607,73.787) 156.972,73.787 156.972,74.295 ccw(c156.718,74.295) 156.718,74.549 155.067,74.549 ccw(c155.067,74.295) 154.813,74.295 154.813,73.533 cw(c154.432,73.533) 154.432,73.152 152.527,73.152 cw(c152.527,73.66) 152.019,73.66 152.019,87.249 ccw(c151.638,87.249) 151.638,87.63 150.422,87.63 ccw(c150.422,87.195) 149.987,87.195 149.987,71.12 ccw(c150.495,71.12) 150.495,70.612 152.146,70.612 cw(c152.146,70.104) 152.654,70.104 152.654,65.024 cw(c152.146,65.024) 152.146,64.516 149.479,64.516 ccw(c149.479,64.008) 148.971,64.008 148.971,62.738 ccw(c149.352,62.738)
  region net GND: 159.385,65.405 163.322,65.405 ccw(c163.322,65.659) 163.576,65.659 163.576,66.294 ccw(c163.314,66.294) 163.314,66.556 162.044,66.556 cw(c162.044,66.802) 161.798,66.802 161.798,67.309 ccw(c161.794,67.309) 161.798,67.31 161.798,73.025 cw(c162.433,73.025) 162.433,73.66 ccw(c162.433,73.914) 162.687,73.914 162.687,74.295 ccw(c162.433,74.295) 162.433,74.549 158.75,74.549 cw(c158.75,74.93) 158.369,74.93 158.369,84.836 ccw(c157.861,84.836) 157.861,85.344 157.099,85.344 cw(c157.099,85.725) 156.718,85.725 156.718,87.63 156.21,87.63 cw(c156.21,87.884) 155.956,87.884 155.956,88.519 ccw(c155.702,88.519) 155.702,88.773 153.162,88.773 ccw(c153.162,88.265) 152.654,88.265 152.654,81.391 154.305,81.391 154.305,83.312 cw(c154.94,83.312) 154.94,83.947 157.226,83.947 cw(c157.226,83.566) 157.607,83.566 157.607,74.168 ccw(c158.115,74.168) 158.115,73.66 158.623,73.66 cw(c158.623,73.279) 159.004,73.279 159.004,67.31 159.004,65.786 ccw(c159.385,65.786)
  region net NetF3_1: 145.288,85.217 136.144,85.217 ccw(c136.144,84.677) 135.604,84.677 135.604,83.121 ccw(c136.557,83.121) 136.557,82.169 145.637,82.169 145.637,84.868 ccw(c145.288,84.868)
Bottom Layer:
  region net Vin: 125.984,47.498 144.78,47.498 ccw(c144.78,48.133) 145.415,48.133 145.415,57.277 cw(c145.796,57.277) 145.796,57.658 156.972,57.658 ccw(c156.972,58.293) 157.607,58.293 157.607,81.153 ccw(c157.099,81.153) 157.099,81.661 135.763,81.661 ccw(c135.763,81.28) 135.382,81.28 135.382,80.772 ccw(c135.763,80.772) 135.763,80.391 138.43,80.391 cw(c138.43,80.01) 138.811,80.01 138.811,78.359 ccw(c139.192,78.359) 139.192,77.978 140.589,77.978 ccw(c140.589,78.232) 140.843,78.232 140.843,78.486 cw(c141.351,78.486) 141.351,78.994 145.542,78.994 ccw(c145.542,79.248) 145.796,79.248 145.796,80.137 cw(c146.05,80.137) 146.05,80.391 154.813,80.391 cw(c154.813,79.883) 155.321,79.883 155.321,59.436 cw(c154.813,59.436) 154.813,58.928 144.272,58.928 ccw(c144.272,58.293) 143.637,58.293 143.637,50.165 cw(c142.748,50.165) 142.748,49.276 126.111,49.276 ccw(c126.111,48.768) 125.603,48.768 125.603,47.879 ccw(c125.984,47.879)
  region net GND: 125.73,50.419 142.367,50.419 ccw(c142.367,51.181) 143.129,51.181 143.129,59.055 cw(c144.145,59.055) 144.145,60.071 147.574,60.071 cw(c147.574,59.817) 147.828,59.817 147.828,59.436 ccw(c148.082,59.436) 148.082,59.182 154.305,59.182 ccw(c154.305,59.436) 154.559,59.436 154.559,60.325 154.559,61.341 ccw(c154.305,61.341) 154.305,61.595 149.225,61.595 cw(c149.225,62.103) 148.717,62.103 148.717,62.611 ccw(c147.955,62.611) 147.955,63.373 139.065,63.373 ccw(c139.065,62.611) 138.303,62.611 138.303,53.086 cw(c137.541,53.086) 137.541,52.324 133.858,52.324 cw(c133.858,53.34) 132.842,53.34 132.842,72.39 ccw(c132.207,72.39) 132.207,73.025 129.159,73.025 cw(c129.159,73.914) 128.27,73.914 128.27,75.057 cw(c128.778,75.057) 128.778,75.565 134.112,75.565 ccw(c134.112,76.327) 134.874,76.327 134.874,84.328 134.874,87.884 cw(c135.382,87.884) 135.382,88.392 145.415,88.392 cw(c145.415,87.249) 146.558,87.249 146.558,84.582 ccw(c147.32,84.582) 147.32,83.82 157.988,83.82 ccw(c157.988,84.201) 158.369,84.201 158.369,85.09 ccw(c157.988,85.09) 157.988,85.471 149.606,85.471 cw(c149.606,86.106) 148.971,86.106 148.971,93.218 ccw(c148.463,93.218) 148.463,93.726 133.223,93.726 ccw(c133.223,93.091) 132.588,93.091 132.588,77.343 126.746,77.343 ccw(c126.746,76.454) 125.857,76.454 125.857,68.961 ccw(c126.492,68.961) 126.492,68.326 128.651,68.326 cw(c128.651,67.818) 129.159,67.818 129.159,54.991 cw(c128.397,54.991) 128.397,54.229 125.73,54.229 ccw(c125.73,53.848) 125.349,53.848 125.349,50.8 ccw(c125.73,50.8)
  pour cut-out: 134.315,54.102 135.827,54.102 134.366,54.102 cw(c134.366,54.356) 134.315,54.107
  region net +5: 137.287,54.102 137.287,67.437 151.511,67.437 ccw(c151.511,67.691) 151.765,67.691 151.765,69.342 ccw(c151.384,69.342) 151.384,69.723 149.86,69.723 cw(c149.86,70.612) 148.971,70.612 148.971,72.39 ccw(c148.463,72.39) 148.463,72.898 144.018,72.898 ccw(c144.018,72.39) 143.51,72.39 143.51,70.485 cw(c143.002,70.485) 143.002,69.977 134.747,69.977 ccw(c134.747,69.342) 134.112,69.342 134.112,56.642 cw(c133.858,56.642) 133.858,56.388 133.731,56.388 ccw(c133.731,56.134) 133.477,56.134 133.477,54.102 ccw(c133.731,54.102) 133.731,53.848 137.033,53.848 ccw(c137.033,54.102)

## Silkscreen, mask and mechanical layers (free items; w line width, h text height)
Top Overlay:
  lines w0.2: 125.476,78.486 126.151,78.486 ; 125.73,82.169 131.826,82.169 131.826,78.486 127.595,78.486 ; 129.794,78.232 129.794,78.486 ; 130.937,82.169 130.937,82.423
  text "3.3" at 124.787,86.582 h2
  text "5V" at 127.581,86.582 h2
  text "VIN" at 130.169,81.783 h2 r270
  text "+5V" at 152.241,69.65 h2 r270
  text "USB" at 152.241,65.459 h2 r270
  text ">TXD" at 165.046,64.824 h2 r270
  text "<RXD" at 167.713,64.824 h2 r270
  text "PB5" at 169.882,63.722 h2
  text "PB4" at 169.882,61.866 h2
  text "RST" at 128.724,61.006 h1.7
  text "PB3" at 169.882,59.352 h2
  text "3.3" at 128.724,58.007 h2
  text "PB2" at 169.882,56.86 h2
  text "+5" at 128.724,55.416 h2
  text "PB1" at 169.882,54.369 h2
  text "GND" at 128.724,52.786 h2
  text "PB0" at 169.882,51.855 h2
  text "GND" at 128.724,50.156 h2
  text "PD7" at 169.745,47.825 h2
  text "Vin" at 128.726,47.571 h2
  text "PD6" at 169.745,45.277 h2
  text "PC0" at 128.851,42.767 h2
  text "PD5" at 169.745,42.735 h2
  text "PC1" at 128.851,40.227 h2
  text "PD4" at 169.745,40.078 h2
  text "PC2" at 128.851,37.687 h2
  text "PD3" at 169.745,37.667 h2
  text "MKII" at 147.774,35.506 h2
  text "PC3" at 128.851,35.147 h2
  text "PD2" at 169.745,35.141 h2
  text "PC4" at 128.851,32.607 h2
  text "PD1" at 169.745,32.615 h2
  text "RESET" at 134.271,30.172 h2 r90
  text "PC5" at 128.851,30.067 h2
  text "PD0" at 169.745,30.067 h2
Bottom Overlay:
  text "ATMEGA328 / eBoard V1.0" at 147.955,43.053 h2.5
  text "github.com/aKaReZa75" at 147.755,41.597 h2

## Text inside footprints (layer, text, board x,y; h text height)
J3: Mechanical 13 "PCB EDGE" at 154.94,93.929 h0.61 r180
P2: Top Overlay "2" at 144.221,31.598 h1; Top Overlay "1" at 144.501,28.931 h1